# Altium PCB TAS5711.PcbDoc
Units mm, origin at the board's own origin, x right, y up, seen from the top; angles counter-clockwise.
Board outline 40 x 40 mm, 2 copper layers (Component Side, Solder Side), stack 1.57 mm thick; 58 components, 41 nets, 214 pads, 63 vias.
Unrouted connection lines stored in the file: 24.
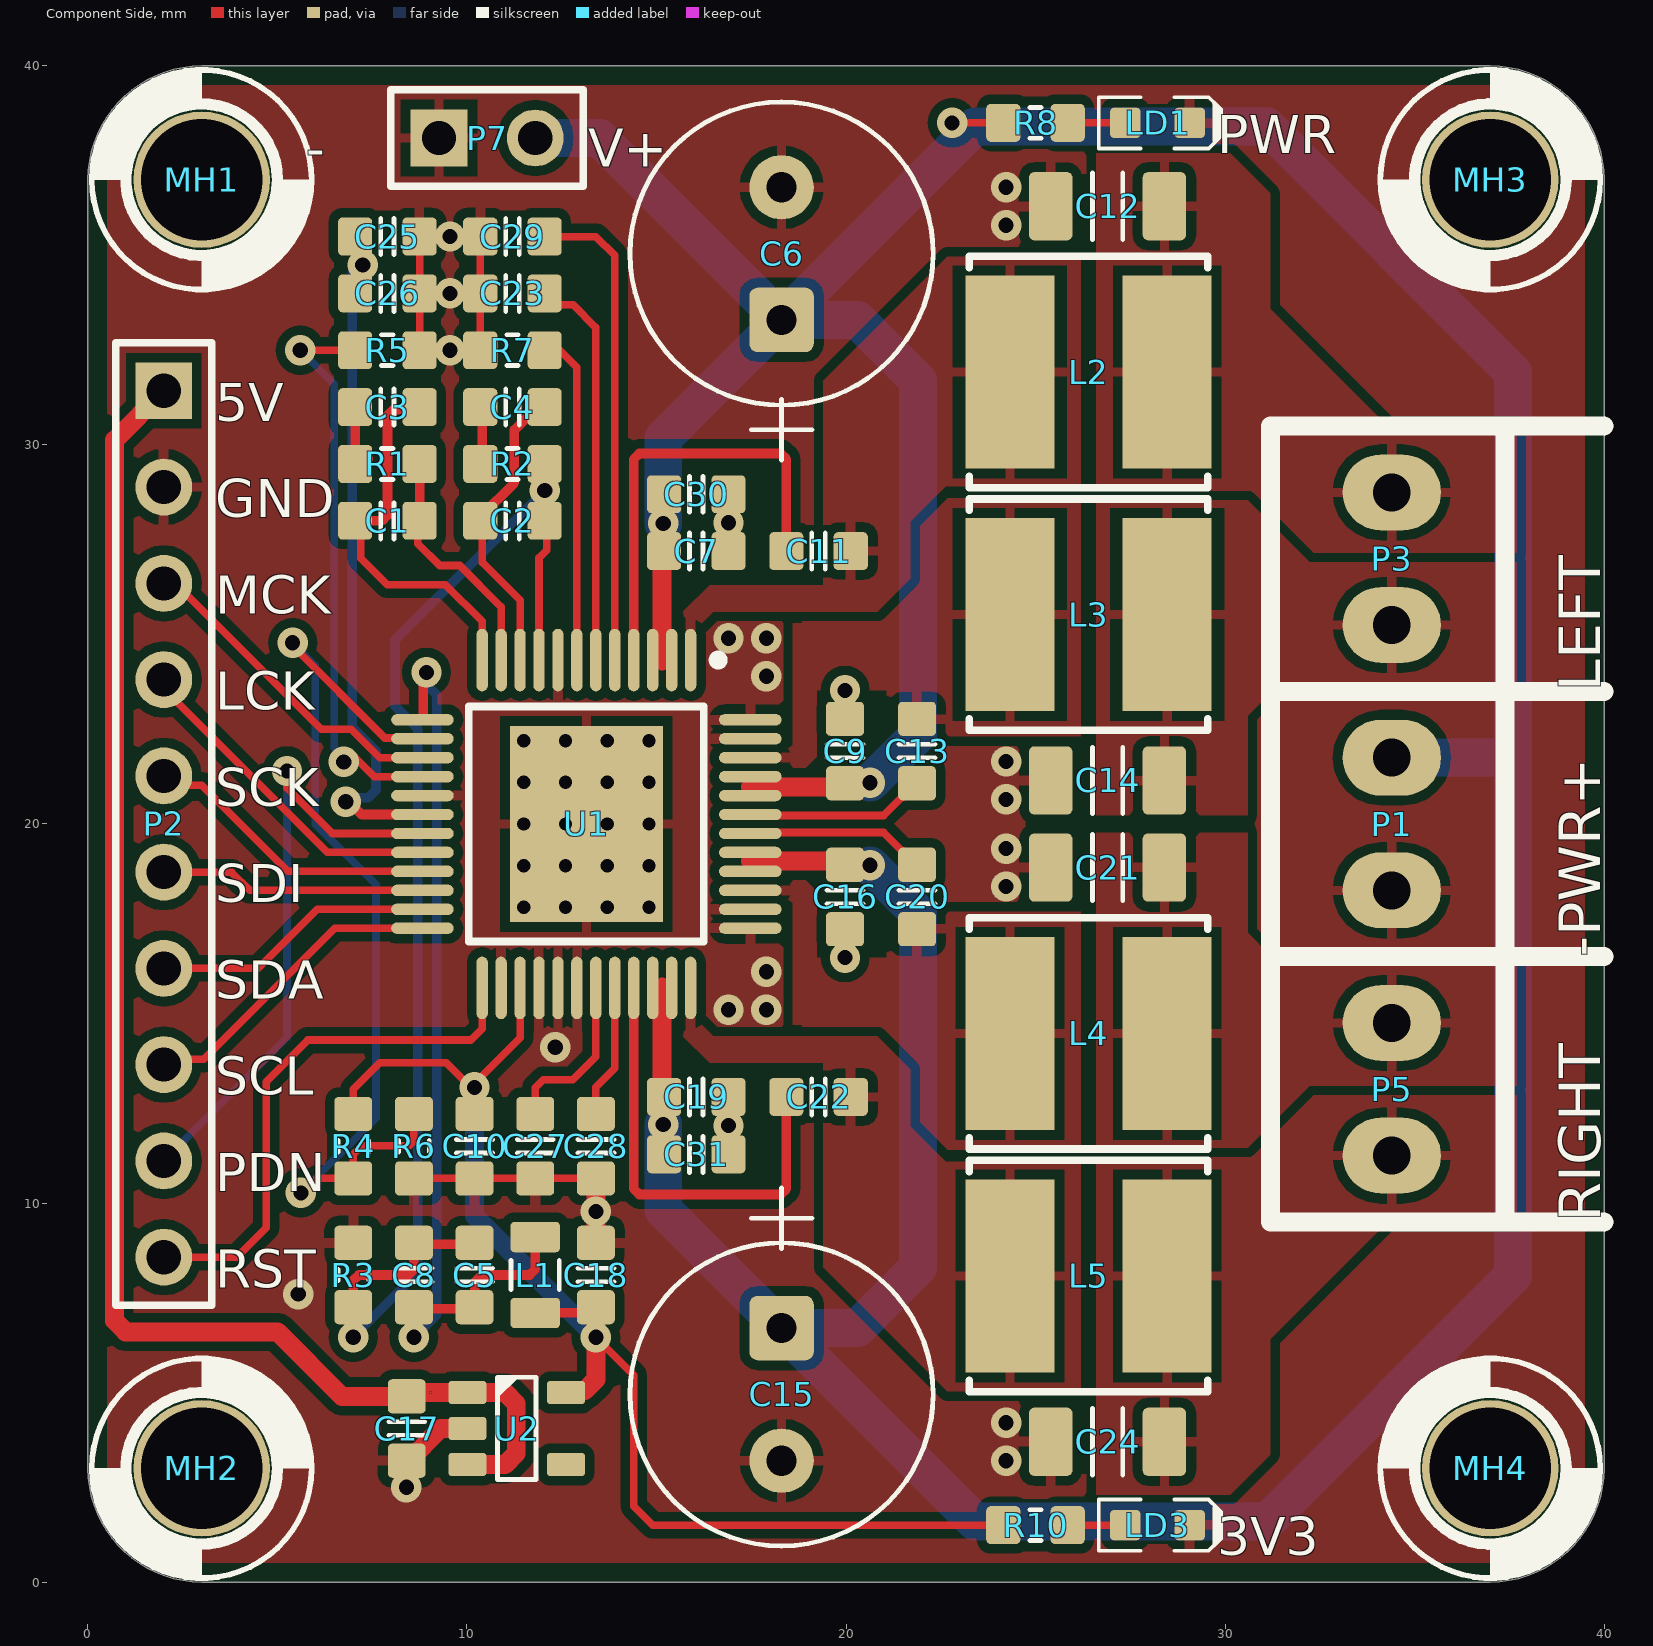
[diagram p0: Component Side view]
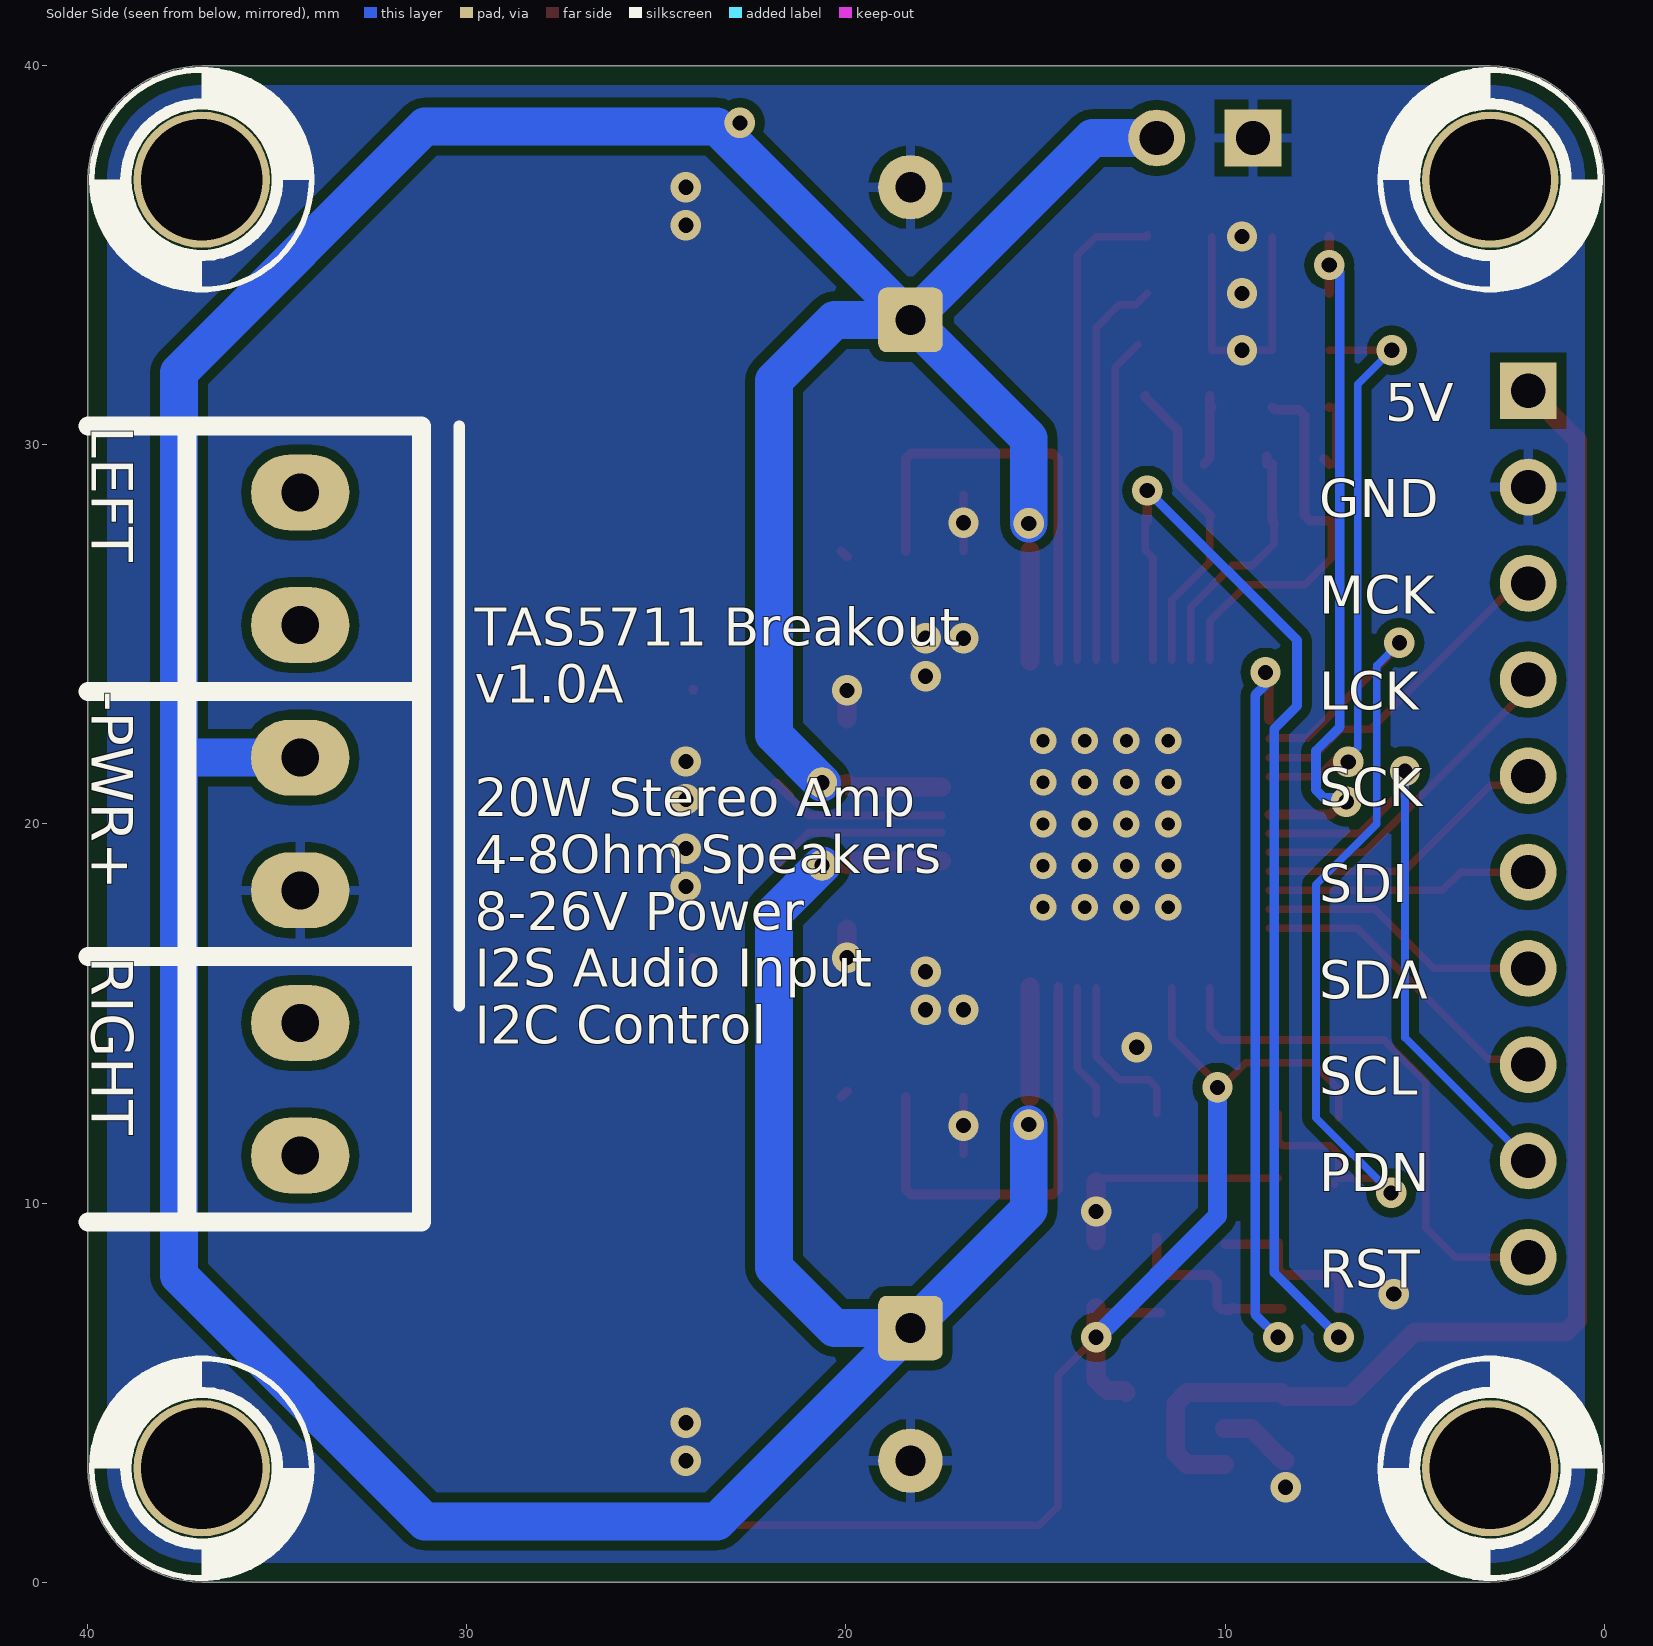
[diagram p1: Solder Side view, seen from below]
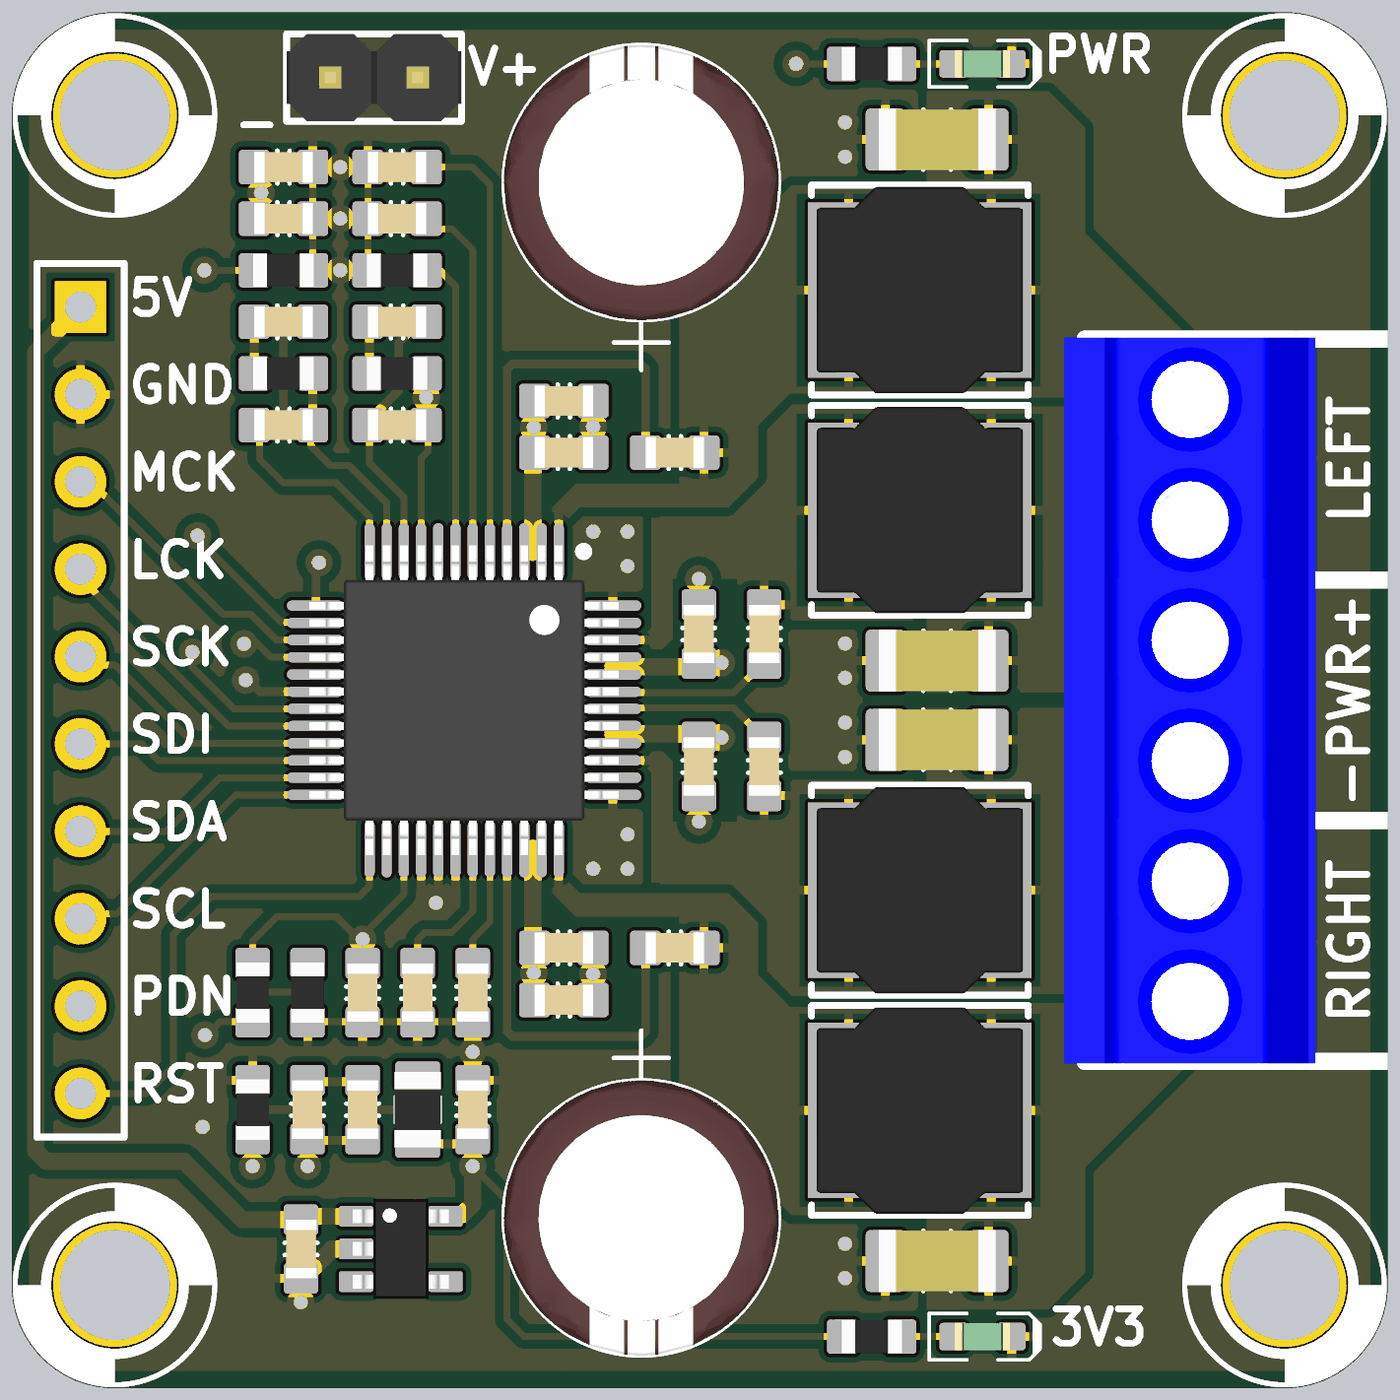
[diagram p2: 3D render of the assembled board from above, using the file's embedded part models]

## Layer stack, top to bottom
Top Solder: solder mask 0.0102, Solder Resist, Dk 3.5
Component Side: signal copper 0.035
Dielectric 3: prepreg 1.5, Dk 4.2
Solder Side: signal copper 0.035
Bottom Solder: solder mask 0.0102, Solder Resist, Dk 3.5

## Board outline
0,3 ccw(c3,3) 3,0 37,0 ccw(c37,3) 40,3 40,37 ccw(c37,37) 37,40 3,40 ccw(c3,37) 0,37

## Design rules (kind name [scope] priority, off if disabled: settings)
AssemblyTestPointUsage [All] p1 off:
AssemblyTestpoint [All] p1 off: testpointundercomponent=TRUE minsize=1.016 maxsize=2.54 preferedsize=1.524 minholesize=0 maxholesize=1.016 preferedholesize=0.813 testpointgrid=0.025 usegrid=TRUE gridtolerance=0 allowsidetop=TRUE allowsidebottom=TRUE
BoardOutlineClearance [All] p1: gap=0.254 ignorepadtopadclearanceinfootprint=FALSE except(0.5: Poly-OutlineEdge)
Clearance [All] p1: gap=0.25 ignorepadtopadclearanceinfootprint=FALSE except(0.2: Arc-SMDPad Track-SMDPad SMDPad-SMDPad)
ComponentClearance [All] p1: gap=0.2 collisioncheckmode=3 verticalgap=0.25 showdistances=FALSE
DiffPairsRouting [All] p1: maxlimit=1 minlimit=0.254 mostfreqgap=0.254 toplayer_minwidth=0.2 toplayer_maxwidth=0.4 toplayer_prefwidth=0.254 bottomlayer_minwidth=0.2 bottomlayer_maxwidth=0.4 bottomlayer_prefwidth=0.254 maxuncoupledlength=12.7
FabricationTestPointUsage [All] p1 off: valid=0 allowmultiple=FALSE
FabricationTestpoint [All] p1 off: side=3 testpointundercomponent=TRUE minsize=1.016 maxsize=2.54 preferedsize=1.524 minholesize=0 maxholesize=1.016 preferedholesize=0.813 testpointgrid=0.025 allowsidetop=TRUE allowsidebottom=TRUE usegrid=TRUE gridtolerance=0
HoleSize [All] p1: absolutevalues=TRUE maxlimit=4 minlimit=0.025 maxpercent=80.000 minpercent=20.000
MinimumSolderMaskSliver [All] p1: minsoldermaskwidth=0
NetAntennae [All] p1 off: netantennaetolerance=0
PolygonConnect PolygonConnect_Via [All vs IsVia] p1: connectstyle=Direct reliefconductorwidth=0.254 reliefentries=4 polygonreliefangle="90 Angle" airgapwidth=0.254
PolygonConnect [All] p2: connectstyle=Relief reliefconductorwidth=0.254 reliefentries=4 polygonreliefangle="90 Angle" airgapwidth=0.254
RoutingVias [All] p1: holewidth=0.4 width=0.8 viastyle="Through Hole" minholewidth=0.35 minwidth=0.7 maxholewidth=1 maxwidth=1.5
SilkToSilkClearance [All] p1: silktosilkclearance=0.1
SilkToSolderMaskClearance SilkscreenOverComponentPads [IsPad] p1: minsilkscreentomaskgap=0 clearancetoexposedcopper=TRUE
SolderMaskExpansion [All] p1: expansion=0.102 istentingtop=FALSE
Width Width_1 [All] p1: maxlimit=3 minlimit=0.2 preferedwidth=0.2 minimp=50.000000 maximp=50.000000 favimp=50.000000
19 further rules are at their usual default settings.

## Components (designator, comment, footprint, x,y, rotation, side; value= is the part's Value field where it differs from the comment)
C1 "Capacitor" CAPC1608X90N 7.9,28 r0 top value=4700pF
C2 "Capacitor" CAPC1608X90N 11.2,28 r0 top value=4700pF
C3 "Capacitor" CAPC1608X90N 7.9,31 r180 top value=0.047µF
C4 "Capacitor" CAPC1608X90N 11.2,31 r180 top value=0.047µF
C5 "Capacitor" CAPC1608X90N 10.2,8.1 r270 top value=4.7µF
C6 "CapE-8.0-THT-220uF-35V" CAPAE250P680X1220_VERT 18.3,35.05 r90 top value="220uF 35V"
C7 "Capacitor" CAPC1608X90N 16.05,27.2 r180 top value=0.1µF
C8 "Capacitor" CAPC1608X90N 8.6,8.1 r270 top value=0.1µF
C9 "Capacitor" CAPC1608X90N 19.975,21.925 r270 top value=0.1µF
C10 "Capacitor" CAPC1608X90N 10.2,11.5 r90 top value=0.1µF
C11 "Capacitor" CAPC1608X90N 19.275,27.2 r0 top value=0.033µF
C12 "Capacitor" CAPC3216X100N 26.9,36.3 r0 top value=0.68µF
C13 "Capacitor" CAPC1608X90N 21.875,21.925 r90 top value=0.033µF
C14 "Capacitor" CAPC3216X100N 26.9,21.15 r180 top value=0.68µF
C15 "CapE-8.0-THT-220uF-35V" CAPAE250P680X1220_VERT 18.3,4.95 r270 top value="220uF 35V"
C16 "Capacitor" CAPC1608X90N 19.975,18.075 r90 top value=0.1µF
C17 "Capacitor" CAPC1608X90N 8.41,4.05 r90 top value=4.7µF
C18 "Capacitor" CAPC1608X90N 13.4,8.1 r270 top value=4.7µF
C19 "Capacitor" CAPC1608X90N 16.05,12.8 r180 top value=0.1µF
C20 "Capacitor" CAPC1608X90N 21.875,18.075 r270 top value=0.033µF
C21 "Capacitor" CAPC3216X100N 26.9,18.85 r0 top value=0.68µF
C22 "Capacitor" CAPC1608X90N 19.275,12.8 r0 top value=0.033µF
C23 "Capacitor" CAPC1608X90N 11.2,34 r0 top value=2200pF
C24 "Capacitor" CAPC3216X100N 26.9,3.7 r180 top value=0.68µF
C25 "Capacitor" CAPC1608X90N 7.9,35.5 r180 top value=4.7µF
C26 "Capacitor" CAPC1608X90N 7.9,34 r180 top value=0.1µF
C27 "Capacitor" CAPC1608X90N 11.8,11.5 r90 top value=0.1µF
C28 "Capacitor" CAPC1608X90N 13.4,11.5 r90 top value=1µF
C29 "Capacitor" CAPC1608X90N 11.2,35.5 r0 top value=1µF
C30 "Capacitor" CAPC1608X90N 16.05,28.7 r180 top value=1µF
C31 "Capacitor" CAPC1608X90N 16.05,11.284 r180 top value=1µF
L1 "" "Res 2012-0805" 11.8,8.1 r90 top value=4.7µH
L2 "Inductor SMD 10uH 2.4A" "SRN6045TA SMD INDUCTOR" 26.4,31.925 r90 top value="10uH 2.4A"
L3 "Inductor SMD 10uH 2.4A" "SRN6045TA SMD INDUCTOR" 26.4,25.525 r90 top value="10uH 2.4A"
L4 "Inductor SMD 10uH 2.4A" "SRN6045TA SMD INDUCTOR" 26.4,14.475 r90 top value="10uH 2.4A"
L5 "Inductor SMD 10uH 2.4A" "SRN6045TA SMD INDUCTOR" 26.4,8.075 r90 top value="10uH 2.4A"
LD1 "LEDG  0603" "LED 1608-0603" 28.219,38.5 r0 top
LD3 "LEDG  0603" "LED 1608-0603" 28.219,1.5 r0 top
MH1 "Screw Hole" M3-Hole-2 3,37 r90 top
MH2 "Screw Hole" M3-Hole-2 3,3 r0 top
MH3 "Screw Hole" M3-Hole-2 37,37 r0 top
MH4 "Screw Hole" M3-Hole-2 37,3 r90 top
P1 "PWR_TERM" "TERM2 3.5mm" 34.4,21.75 r270 top
P2 "Header 10" HDR1X10 2,31.43 r270 top
P3 "SPKR_LEFT_TERM" "TERM2 3.5mm" 34.4,28.75 r270 top
P5 "SPKR_RIGHT_TERM" "TERM2 3.5mm" 34.4,14.75 r270 top
P7 "PWR_HDR" HDR1X2-HEADER 9.26,38.1 r0 top
R1 "Resistor" "RES 1608-0603" 7.9,29.5 r0 top value=470R
R2 "Resistor" "RES 1608-0603" 11.2,29.5 r0 top value=470R
R3 "Res-0603-0R" "RES 1608-0603" 7,8.1 r270 top value=0R
R4 "Resistor" "RES 1608-0603" 7,11.5 r270 top value="10K (DNP)"
R5 "Resistor" "RES 1608-0603" 7.9,32.5 r180 top value=18.2K
R6 "Resistor" "RES 1608-0603" 8.6,11.5 r270 top value=10K
R7 "Resistor" "RES 1608-0603" 11.2,32.5 r0 top value=22K
R8 "Resistor" "RES 1608-0603" 25,38.5 r180 top value=10K
R10 "Resistor" "RES 1608-0603" 25,1.5 r180 top value=1K
U1 "TAS5711" TSQFP50P900X900X105_HS-49M 13.15,20 r270 top
U2 "AP2112K-3.3TRG1" SOT23-5 11.31,4.05 r0 top

## Footprints (in the part's own frame and the unit in brackets; to place one, negate y for a bottom-side part, rotate by r counter-clockwise, add the part's x,y. Pads: shape width x height; smd on the part's side, far side on the other; paste and mask are expansions set on the pad)
CAPAE250P680X1220_VERT [mm]
  round 0.508 on Mech15: 0(0,0)
  rrect25% 1.7x1.7 hole 0.8: 1(-1.75,0)
  round 1.7 hole 0.8: 2(1.75,0)
  silkscreen extent -5.45,-4 4,4, body extent -4,-4 4,4, height 11.5
CAPC1608X90N [mm] "Chip Capacitor, Body 1.6x0.8mm, EIA 0603, IPC Medium Density"
  round 0.254 on Mech15: 0(0,0)
  rrect25% 0.9x1 smd: 1(-0.85,0) 2(0.85,0)
  Component Side pour cut-out: -0.6,0.5 -0.4,0.7 0.4,0.7 0.6,0.5 0.6,-0.5 0.4,-0.7 -0.4,-0.7 -0.6,-0.5
  silkscreen extent -0.18,-0.48 0.18,0.48, body extent -0.85,-0.45 0.85,0.45, height 0.89
CAPC3216X100N [mm] "Chip Capacitor, Body 3.2x1.6mm, 1.0mm H, EIA 1206, IPC Medium Density"
  round 0.508 on Mech15: 0(0,0)
  rrect25% 1.15x1.8 smd: 1(-1.5,0) 2(1.5,0)
  silkscreen extent -0.4,-0.88 0.4,0.88, body extent -1.7,-0.9 1.7,0.9, height 1
HDR1X2-HEADER [mm]
  rect 1.5x1.5 hole 0.9: 1(0,0)
  round 1.5 hole 0.9: 2(2.54,0)
  silkscreen extent -1.27,-1.27 3.81,1.27, body extent -1.27,-1.27 3.81,1.27, height 8.6
HDR1X10 [mm] "Connector; Header; 10 Position"
  rect 1.5x1.5 hole 0.9: 1(0,0)
  round 1.5 hole 0.9: 2(2.54,0) 3(5.08,0) 4(7.62,0) 5(10.16,0) 6(12.7,0) 7(15.24,0) 8(17.78,0) 9(20.32,0) 10(22.86,0)
  silkscreen extent -1.27,-1.27 24.13,1.27
"LED 1608-0603" [mm]
  round 0.254 on Mech15: 0(0,0)
  rrect25% 0.8x0.8 smd: 1(-0.85,0) 2(0.85,0)
  Component Side pour cut-out: -0.5,0.5 0.5,0.5 0.5,-0.5 -0.5,-0.5
  silkscreen extent -1.55,-0.67 1.68,0.67, body extent -0.8,-0.4 0.8,0.4, height 0.75
M3-Hole-2 [mm]
  round 3.6 hole 3.2: M3(0,0)
  silkscreen extent -2.9,-2.93 2.9,2.93
"RES 1608-0603" [mm]
  round 0.254 on Mech15: 0(0,0)
  rrect25% 0.9x1 smd: 1(-0.85,0) 2(0.85,0)
  Component Side pour cut-out: -0.6,0.5 -0.4,0.7 0.4,0.7 0.6,0.5 0.6,-0.5 0.4,-0.7 -0.4,-0.7 -0.6,-0.5
  silkscreen extent -0.15,-0.41 0.15,0.41, body extent -0.87,-0.47 0.88,0.48, height 0.54
"Res 2012-0805" [mm]
  round 0.254 on Mech15: 0(0,0)
  rrect25% 0.8x1.3 smd: 1(-1,0) 2(1,0)
  Component Side pour cut-out: -0.725,0.65 -0.525,0.85 0.525,0.85 0.725,0.65 0.725,-0.65 0.525,-0.85 -0.525,-0.85 -0.725,-0.65
  silkscreen extent -0.38,-0.64 0.38,0.64, body extent -1.1,-0.67 1.1,0.68, height 0.69
SOT23-5 [mm]
  round 0.5 on Mech15: 0(0,0)
  rrect25% 1x0.6 smd: 1(-1.3,0.95) 2(-1.3,0) 3(-1.3,-0.95) 4(1.3,-0.95) 5(1.3,0.95)
  silkscreen extent -0.51,-1.35 0.51,1.35, body extent -1.4,-1.45 1.4,1.45, height 1.44
"SRN6045TA SMD INDUCTOR" [mm]
  rect 5.1x2.35 smd: 1(0,2.075) 2(0,-2.075)
  silkscreen extent -3.05,-3.15 3.05,3.15, body extent -3,-3 3,3, height 4.2
"TERM2 3.5mm" [mm]
  oval 2x2.6 hole 1: 1(0,0) 2(3.5,0)
  body extent -1.8,-3.79 5.31,3.5, height 8.51
TSQFP50P900X900X105_HS-49M [mm] "TSQFP, 48-Leads, Body 7.00x7.00mm, Pitch 0.50mm, Thermal Pad 5.17x4.03mm, IPC Low Density"
  oval 1.65x0.3 smd: 1(-4.325,2.75) 2(-4.325,2.25) 3(-4.325,1.75) 4(-4.325,1.25) 5(-4.325,0.75) 6(-4.325,0.25) 7(-4.325,-0.25) 8(-4.325,-0.75) 9(-4.325,-1.25) 10(-4.325,-1.75) 11(-4.325,-2.25) 12(-4.325,-2.75) 25(4.325,-2.75) 26(4.325,-2.25) 27(4.325,-1.75) 28(4.325,-1.25) 29(4.325,-0.75) 30(4.325,-0.25) 31(4.325,0.25) 32(4.325,0.75) 33(4.325,1.25) 34(4.325,1.75) 35(4.325,2.25) 36(4.325,2.75)
  oval 0.3x1.65 smd: 13(-2.75,-4.325) 14(-2.25,-4.325) 15(-1.75,-4.325) 16(-1.25,-4.325) 17(-0.75,-4.325) 18(-0.25,-4.325) 19(0.25,-4.325) 20(0.75,-4.325) 21(1.25,-4.325) 22(1.75,-4.325) 23(2.25,-4.325) 24(2.75,-4.325) 37(2.75,4.325) 38(2.25,4.325) 39(1.75,4.325) 40(1.25,4.325) 41(0.75,4.325) 42(0.25,4.325) 43(-0.25,4.325) 44(-0.75,4.325) 45(-1.25,4.325) 46(-1.75,4.325) 47(-2.25,4.325) 48(-2.75,4.325)
  rect 5.17x4.03 smd: 49(0,0)
  silkscreen extent -4.45,-3.1 3.1,3.6, body extent -4.5,-4.5 4.5,4.5, height 1.05

## Part data
C1 C2: library part UMJ107BB7472KAHT, "CAP CER 4700PF 50V X7R 0603", Manufacturer 1="Taiyo Yuden", Operating Temperature="-55°C ~ 125°C", Package=0402, Package / Case="0603 (1608 Metric)", Supplier Part Number 1=587-4470-1-ND, Temperature Coefficient=X7R, TOLERANCE=±10%, Voltage=50V, Manufacturer Part Number 1=UMJ107BB7472KAHT, Note="Approved sub OK", Revision="July-2002: Re-released for DXP Platform.", Size / Dimension="0.063\" L x 0.031\" W (1.60mm x 0.80mm)", Supplier 1=Digi-Key, Thickness (Max)="0.039\" (1.00mm)", Type=X5R
C3 C4: library part TMK107BJ473KAHT, "CAP CER 0.047UF 25V X5R 0603", Manufacturer 1="Taiyo Yuden", Operating Temperature="-55°C ~ 85°C", Package=0402, Package / Case="0603 (1608 Metric)", Supplier Part Number 1=587-3475-1-ND, Temperature Coefficient=X5R, TOLERANCE=±10%, Voltage=25V, Manufacturer Part Number 1=TMK107BJ473KAHT, Note="Approved sub OK", Revision="July-2002: Re-released for DXP Platform.", Size / Dimension="0.063\" L x 0.031\" W (1.60mm x 0.80mm)", Supplier 1=Digi-Key, Thickness (Max)="0.035\" (0.90mm)", Type=X5R
C5 C17 C18 C25: library part C1608X5R1C475K080AC, "CAP CER 4.7UF 16V X5R 0603", Manufacturer 1="TDK Corporation", Operating Temperature="-55°C ~ 85°C", Package=0402, Package / Case="0603 (1608 Metric)", Supplier Part Number 1=445-7478-1-ND, Temperature Coefficient=X5R, TOLERANCE=±10%, Voltage=16V, Manufacturer Part Number 1=C1608X5R1C475K080AC, Note="Approved sub OK", Revision="July-2002: Re-released for DXP Platform.", Size / Dimension="0.063\" L x 0.031\" W (1.60mm x 0.80mm)", Supplier 1=Digi-Key, Thickness (Max)="0.035\" (0.90mm)", Type=X5R
C6 C15: "CAP ALUM 220UF 20% 35V RADIAL", Supplier Part Number 1=732-8946-1-ND, Note="Approved sub OK", Published=8-Jun-2000, Publisher="Altium Limited", Revision="July-2002: Re-released for DXP Platform.", Supplier 1=Digi-Key
C7 C8 C9 C10 C16 C19 C26 C27: library part UMJ107BB7104KAHT, "CAP CER 0.1UF 50V X7R 0603", Manufacturer 1="Taiyo Yuden", Operating Temperature="-55°C ~ 125°C", Package=0402, Package / Case="0603 (1608 Metric)", Supplier Part Number 1=587-4474-1-ND, Temperature Coefficient=X7R, TOLERANCE=±10%, Voltage=50V, Manufacturer Part Number 1=UMJ107BB7104KAHT, Note="Approved sub OK", Revision="July-2002: Re-released for DXP Platform.", Size / Dimension="0.063\" L x 0.031\" W (1.60mm x 0.80mm)", Supplier 1=Digi-Key, Thickness (Max)="0.039\" (1.00mm)", Type=X5R
C11 C13 C20 C22: library part UMJ107BB7104KAHT, "CAP CER 0.033UF 50V X7R 0603", Manufacturer 1="Taiyo Yuden", Operating Temperature="-55°C ~ 125°C", Package=0402, Package / Case="0603 (1608 Metric)", Supplier Part Number 1=399-14292-1-ND, Temperature Coefficient=X7R, TOLERANCE=±10%, Voltage=50V, Manufacturer Part Number 1=UMJ107BB7104KAHT, Note="Approved sub OK", Revision="July-2002: Re-released for DXP Platform.", Size / Dimension="0.063\" L x 0.031\" W (1.60mm x 0.80mm)", Supplier 1=Digi-Key, Thickness (Max)="0.039\" (1.00mm)", Type=X7R
C12 C14 C21 C24: library part C3216X7R2A684K160AA, "CAP CER 0.68UF 100V X7R 1206", Manufacturer 1="TDK Corporation", Operating Temperature="-55°C ~ 125°C", Package=0402, Package / Case="1206 (3216 Metric)", Supplier Part Number 1=445-14810-1-ND, Temperature Coefficient=X7R, TOLERANCE=±10%, Voltage=100V, Manufacturer Part Number 1=C3216X7R2A684K160AA, Note="Approved sub OK", Revision="July-2002: Re-released for DXP Platform.", Size / Dimension="0.126\" L x 0.063\" W (3.20mm x 1.60mm)", Supplier 1=Digi-Key, Thickness (Max)="0.071\" (1.80mm)", Type=X5R
C23: library part C1608X5R2A222M080AA, "CAP CER 2200PF 100V X5R 0603", Manufacturer 1="TDK Corporation", Operating Temperature="-55°C ~ 85°C", Package=0402, Package / Case="0603 (1608 Metric)", Supplier Part Number 1=445-14182-1-ND, Temperature Coefficient=X5R, TOLERANCE=±20%, Voltage=100V, Manufacturer Part Number 1=C1608X5R2A222M080AA, Note="Approved sub OK", Revision="July-2002: Re-released for DXP Platform.", Size / Dimension="0.063\" L x 0.031\" W (1.60mm x 0.80mm)", Supplier 1=Digi-Key, Thickness (Max)="0.035\" (0.90mm)", Type=X5R
C28 C29 C30 C31: library part GMK107BJ105KAHT, "CAP CER 1UF 35V X5R 0603", Manufacturer 1="Taiyo Yuden", Operating Temperature="-55°C ~ 85°C", Package=0402, Package / Case="0603 (1608 Metric)", Supplier Part Number 1=587-3358-1-ND, Temperature Coefficient=X5R, TOLERANCE=±10%, Voltage=35V, Manufacturer Part Number 1=GMK107BJ105KAHT, Note="Approved sub OK", Revision="July-2002: Re-released for DXP Platform.", Size / Dimension="0.063\" L x 0.031\" W (1.60mm x 0.80mm)", Supplier 1=Digi-Key, Thickness (Max)="0.035\" (0.90mm)", Type=X5R
L1: library part "Ferrite Bead SMD 0805", "FIXED IND 4.7UH 500MA 300MOHM SM", Supplier Part Number 1=445-6401-1-ND, Note="Approved sub OK", Published=24-Mar-1999, Publisher="Altium Limited", Revision="July-2002: Re-released for DXP Platform.", Supplier 1=Digi-Key
L2 L3 L4 L5: library part "Inductor SMD 33uH 2.5A", "FIXED IND 10UH 2.4A 59.8MOHM SMD", Supplier Part Number 1=587-2946-1-ND, Published=24-Mar-1999, Publisher="Altium Limited", Revision="July-2002: Re-released for DXP Platform.", Supplier 1=Digi-Key
LD1 LD3: "LED GREEN CLEAR CHIP SMD 0603", Supplier Part Number 1=160-1435-2-ND, Note="Approved sub OK", Supplier 1=Digi-Key
P1 P3 P5: library part ScrewTerminal-3.5mm-2Way, "Screw Terminal 3.5mm 2-Way", Supplier Part Number 1=277-5719-ND, Note="Approved sub OK", Supplier 1=Digi-Key
P2: "Header, 10-Pin", Manufacturer 1="Generic Header", LatestRevisionDate=17-Jul-2002, LatestRevisionNote="Re-released for DXP Platform.", Note="Approved sub OK", Publisher="Altium Limited"
P7: library part "Header 1X2", "Header, 2-Pin", Manufacturer 1="Generic Header", Note="Approved sub OK"
R1 R2: library part RC0603FR-07470RL, "RES SMD 470 OHM 1% 1/10W 0603", Manufacturer 1=Yageo, Operating Temperature="-55°C ~ 155°C", Package / Case="0603 (1608 Metric)", Power (Watts)="0.1W, 1/10W", Supplier Part Number 1=311-470HRCT-ND, Temperature Coefficient=±100ppm/°C, TOLERANCE=±1%, Composition="Thick Film", Features="Moisture Resistant", Height - Seated (Max)="0.022\" (0.55mm)", Manufacturer Part Number 1=RC0603FR-07470RL, Note="Approved sub OK", Published=8-Jun-2000, Publisher="Altium Limited", Revision="July-2002: Re-released for DXP Platform.", Size / Dimension="0.063\" L x 0.031\" W (1.60mm x 0.80mm)", Supplier 1=Digi-Key
R3: "RES 0 OHM JUMPER 1/10W 0603", Supplier Part Number 1=311-0.0GRCT-ND, Note="Approved sub OK", Published=8-Jun-2000, Publisher="Altium Limited", Revision="July-2002: Re-released for DXP Platform.", Supplier 1=Digi-Key
R4 R6 R8: library part RC0603FR-0710KL, "RES SMD 10K OHM 1% 1/10W 0603", Manufacturer 1=Yageo, Operating Temperature="-55°C ~ 155°C", Package / Case="0603 (1608 Metric)", Power (Watts)="0.1W, 1/10W", Supplier Part Number 1=311-10.0KHRCT-ND, Temperature Coefficient=±100ppm/°C, TOLERANCE=±1%, Composition="Thick Film", Features="Moisture Resistant", Height - Seated (Max)="0.022\" (0.55mm)", Manufacturer Part Number 1=RC0603FR-0710KL, Note="Approved sub OK", Published=8-Jun-2000, Publisher="Altium Limited", Revision="July-2002: Re-released for DXP Platform.", Size / Dimension="0.063\" L x 0.031\" W (1.60mm x 0.80mm)", Supplier 1=Digi-Key
R5: library part RC0603FR-0718K2L, "RES SMD 18.2K OHM 1% 1/10W 0603", Manufacturer 1=Yageo, Operating Temperature="-55°C ~ 155°C", Package / Case="0603 (1608 Metric)", Power (Watts)="0.1W, 1/10W", Supplier Part Number 1=311-18.2KHRCT-ND, Temperature Coefficient=±100ppm/°C, TOLERANCE=±1%, Composition="Thick Film", Features="Moisture Resistant", Height - Seated (Max)="0.022\" (0.55mm)", Manufacturer Part Number 1=RC0603FR-0718K2L, Note="Approved sub OK", Published=8-Jun-2000, Publisher="Altium Limited", Revision="July-2002: Re-released for DXP Platform.", Size / Dimension="0.063\" L x 0.031\" W (1.60mm x 0.80mm)", Supplier 1=Digi-Key
R7: library part RC0603FR-0722KL, "RES SMD 22K OHM 1% 1/10W 0603", Manufacturer 1=Yageo, Operating Temperature="-55°C ~ 155°C", Package / Case="0603 (1608 Metric)", Power (Watts)="0.1W, 1/10W", Supplier Part Number 1=311-22.0KHRCT-ND, Temperature Coefficient=±100ppm/°C, TOLERANCE=±1%, Composition="Thick Film", Features="Moisture Resistant", Height - Seated (Max)="0.022\" (0.55mm)", Manufacturer Part Number 1=RC0603FR-0722KL, Note="Approved sub OK", Published=8-Jun-2000, Publisher="Altium Limited", Revision="July-2002: Re-released for DXP Platform.", Size / Dimension="0.063\" L x 0.031\" W (1.60mm x 0.80mm)", Supplier 1=Digi-Key
R10: library part RC0603FR-071KL, "RES SMD 1K OHM 1% 1/10W 0603", Manufacturer 1=Yageo, Operating Temperature="-55°C ~ 155°C", Package / Case="0603 (1608 Metric)", Power (Watts)="0.1W, 1/10W", Supplier Part Number 1=311-1.00KHRCT-ND, Temperature Coefficient=±100ppm/°C, TOLERANCE=±1%, Composition="Thick Film", Features="Moisture Resistant", Height - Seated (Max)="0.022\" (0.55mm)", Manufacturer Part Number 1=RC0603FR-071KL, Note="Approved sub OK", Published=8-Jun-2000, Publisher="Altium Limited", Revision="July-2002: Re-released for DXP Platform.", Size / Dimension="0.063\" L x 0.031\" W (1.60mm x 0.80mm)", Supplier 1=Digi-Key
U1: library part "IC - DAC, I2S Amplifier - TAS5711", "IC AMP D DUAL/QUAD 21W 48HTQFP", Supplier Part Number 1=296-25564-1-ND, Supplier 1=Digi-Key
U2: library part "Regulator - AP2112K 3.3V Linear Regulator", "IC REG LINEAR 3.3V 600MA SOT25", Manufacturer 1="Diodes Incorporated", Supplier Part Number 1=AP2112K-3.3TRG1DICT-ND, Manufacturer Part Number 1=AP2112K-3.3TRG1, Supplier 1=Digi-Key

## Via types
v1: diameter 0.8, hole 0.4, Component Side to Solder Side, tented both sides, 43 vias
v2: diameter 0.7, hole 0.35, Component Side to Solder Side, tented bottom, 20 vias

## Nets (pads, with @x,y where several pads share a name; then routed paths per layer and width w, separated by ;. In a path a pad name is that pad's centre, name@x,y a point inside that pad or via, vN(x,y) a via of type N, cw(c..) or ccw(c..) an arc to the next point about the centre after c; other vN are vias at no path point)
+3V3: C10.2 C18.2 L1.1 R4.1 R10.2 U1.27 U2.5 | length 35.5
  Component Side w0.2: R4.1@7,12.25 7,13 7.7,13.7 9.45,13.7 10.093,13.057 v1@10.2,13.057 ; C10.2@10.2,12.25 10.2,12.95 v1@10.2,13.057 ; U1.27 11.4,14.364 10.2,13.164 v1@10.2,13.057 ; v1(13.4,6.458) 14.4,5.458 14.4,2 14.9,1.5 R10.2
  Component Side w0.254: L1.1@11.7,7.1 C18.2@13.25,7.1
  Component Side w0.5: U2.5 12.66,5.05 13.107,5.05 13.4,5.343 v1(13.4,6.458) C18.2
  Solder Side w0.5: v1@10.2,12.95 10.2,9.658 v1(13.4,6.458)
  other v1: 10.2,13.05
+5V: C17.2 P2.1 U2.1 U2.3 | length 39.4
  Component Side w0.5: P2.1 0.7,30.13 0.7,6.893 0.993,6.6 5,6.6 6.7,4.9 C17.2 8.51,5 U2.1 11.007,5 11.3,4.707 11.3,3.393 11.007,3.1 U2.3
+VDDA: C5.2 C8.2 L1.2 U1.13 | length 24.3
  Component Side w0.254: C8.2@8.498,7.208 C5.2@9.842,7.208 ; U1.13 8.846,22.771 8.846,23.915 v1(8.931,24) ; C5.2@9.8,7.25 C5.2@9.842,7.208 ; C5.2@9.998,7.175 9.875,7.175 C5.2@9.842,7.208 ; C5.2@9.998,7.208 C5.2@9.842,7.208 ; C5.2@10.1,7.2 10.2,7.3 10.2,7.9 10.4,8.1 11.651,8.1 11.8,8.249 L1.2
  Solder Side w0.254: v1(8.598,6.458) 9.204,7.063 9.204,23.4 8.931,23.672 v1(8.931,24)
A_SEL: R4.2 R6.1 U1.14 | length 25.5
  Component Side w0.2: v1(5.4,24.782) 5.4,24.7 7.831,22.269 8.806,22.269 U1.14 ; v1(5.616,10.267) 5.67,10.267 6.053,10.65 R4.2 7,11.284 7.227,11.511 8.481,11.511 8.598,11.629 8.598,12.348 R6.1 ; R4.2@7.1,10.5 R4.2@7.15,10.55
  Solder Side w0.2: v1(5.4,24.782) 6,24.182 6,20 7.6,18.4 7.6,12.25 v1(5.616,10.267)
AGND: C2.2 C5.1 C8.1 R2.2 R3.2 U1.9 | length 34.1
  Component Side w0.2: U1.9 11.9,27.027 12.1,27.227 C2.2@12.1,28.1
  Component Side w0.254: R3.2@6.998,7.208 6.998,7.951 7.147,8.1 8.451,8.1 8.6,8.249 C8.1 ; C8.1@8.6,8.908 C5.1@9.998,8.908 ; C2.2 v1(12.05,28.8)
  Solder Side w0.254: v1(6.998,6.458) 8.7,8.159 8.7,22.516 8.1,23.116 8.1,24.85 11.872,28.622 v1@11.872,28.828
AMP_PDN: P2.9 U1.19 | length 16.2
  Component Side w0.2: v1(5.25,21.4) 5.25,20.95 6.45,19.75 U1.19
  Solder Side w0.2: P2.9 5.25,14.36 v1(5.25,21.4)
AMP_RST: P2.10 U1.25 | length 14.2
  Component Side w0.2: P2.10 3.926,8.57 4.7,9.344 4.7,13.2 5.8,14.3 10.1,14.3 10.4,14.6 U1.25
GND: C6.2 C7.1 C9.1 C10.1 C12.1 C14.2 C15.2 C16.1 C17.1 C18.1 C19.1 C21.1 C23.1 C24.2 C25.1 C26.1 C27.1 C28.1 C29.1 C30.1 C31.1 LD1.2 LD3.2 P1.2 P2.2 P7.1 R3.1 R5.1 R6.2 R7.1 U1.8 U1.17 U1.26 U1.28 U1.29 U1.30 U1.37 U1.38 U1.47 U1.48 U1.49 U2.2 | length 20.4
  Component Side w0.2: R6.2 C10.1 C27.1 C28.1 ; C25.1 C26.1 R5.1 R7.1 C23.1 C29.1 ; C31.1 C19.1 ; C7.1 C30.1
  Component Side w0.5: C17.1 8.46,3.2 9.3,4.04 9.3,4.05 U2.2 ; C18.1@13.4,9 v1(13.4,9.775) C28.1@13.4,10.55 ; v1(19.975,16.475) C16.1 ; C9.1 v1(19.975,23.525)
  other v1: 8.4,2.5 24.225,3.2 24.225,4.2 5.548,7.596 16.9,12.042 12.331,14.111 16.9,15.1 17.9,15.1 17.9,16.1 24.225,18.35 24.225,19.35 24.225,20.65 24.225,21.65 17.9,23.9 16.9,24.9 17.9,24.9 16.9,27.95 9.55,32.5 9.55,34 9.55,35.5 24.225,35.8 24.225,36.8
  other v2: 11.5,17.8 12.6,17.8 13.7,17.8 14.8,17.8 11.5,18.9 12.6,18.9 13.7,18.9 14.8,18.9 11.5,20 12.6,20 13.7,20 14.8,20 11.5,21.1 12.6,21.1 13.7,21.1 14.8,21.1 11.5,22.2 12.6,22.2 13.7,22.2 14.8,22.2
I2C_SCL: P2.8 U1.24 | length 8.4
  Component Side w0.2: P2.8@2.11,13.65 P2.8 2.14,13.79 3.05,13.79 6.51,17.25 U1.24
I2C_SDA: P2.7 U1.23 | length 7.5
  Component Side w0.2: P2.7 4.49,16.19 6.05,17.75 U1.23
I2S_LRCLK: P2.4 U1.20 | length 8.9
  Component Side w0.2: P2.4 2,23.564 6.314,19.25 U1.20
I2S_MCLK: P2.3 U1.15 | length 8.7
  Component Side w0.2: P2.3 2.3,26.35 6.15,22.5 6.95,22.5 7.7,21.75 U1.15
I2S_SCLK: P2.5 U1.21 | length 7.9
  Component Side w0.2: P2.5 2.249,21.021 3.001,21.021 5.272,18.75 U1.21
I2S_SDIN: P2.6 U1.22 | length 7
  Component Side w0.2: P2.6 3.786,18.73 4.266,18.25 U1.22
NetC1_1: C1.1 C3.1 U1.12 | length 10.4
  Component Side w0.2: C1.1@7.2,28 7.2,27.016 7.9,26.316 9.429,26.316 10.4,25.345 U1.12
  Component Side w0.254: C1.1 7.2,28 7.752,28 7.901,28.149 7.901,30.778 8.05,30.927 8.677,30.927 C3.1
NetC1_2: C1.2 R1.2 U1.11 | length 6.6
  Component Side w0.2: C1.2@8.7,27.95 8.7,27.4 9.28,26.82 9.805,26.82 10.9,25.725 U1.11
  Component Side w0.254: C1.2@8.7,27.95 C1.2 R1.2 ; R1.2@8.9,29.5 R1.2@8.9,29.7
NetC2_1: C2.1 C4.1 U1.10 | length 8.1
  Component Side w0.2: C2.1@10.4,28.1 10.4,26.9 11.4,25.9 U1.10
  Component Side w0.254: C2.1@10.375,28.125 11.25,29 11.25,30.4 12.1,31.25 C4.1@12.1,31.3
NetC3_2: C3.2 R1.1 | length 1.7
  Component Side w0.254: R1.1 C3.2 ; R1.1@7.25,29.5 R1.1@7.39,29.64
NetC4_2: C4.2 R2.1 | length 1.9
  Component Side w0.254: C4.2@10.4,31.3 10.4,29.7 10.4,29.65 R2.1@10.55,29.5
NetC11_1: C11.1 U1.4 | length 11.9
  Component Side w0.254: U1.4@14.4,24.3 14.4,29.627 14.549,29.776 18.276,29.776 18.425,29.627 C11.1
NetC11_2: C11.2 L2.1 U1.1 | length 0.2
  Component Side w0.254: C11.2@19.975,27.05 C11.2
NetC12_2: C12.2 L2.2 P3.1
NetC13_1: C13.1 U1.43 | length 4.8
  Component Side w0.2: U1.43@17.475,20.225 20.996,20.225 C13.1@21.5,20.729
  Component Side w0.25: C13.1@21.5,20.729 21.5,20.75 21.825,21.075 C13.1
NetC13_2: C13.2 L3.1 U1.46 | length 0
  Component Side w0.25: L3.1@24.025,23.525 L3.1@24.025,23.55
NetC14_1: C14.1 L3.2 P3.2
NetC20_1: C20.1 U1.42 | length 4.8
  Component Side w0.2: U1.42@17.475,19.775 20.996,19.775 C20.1@21.5,19.271
  Component Side w0.25: C20.1@21.5,19.271 21.5,19.25 21.825,18.925 C20.1
NetC20_2: C20.2 L4.1 U1.39 | length 0
  Component Side w0.25: L4.1@24.025,16.45 L4.1@24.025,16.475
NetC21_2: C21.2 L4.2 P5.1
NetC22_1: C22.1 U1.33 | length 11.9
  Component Side w0.254: U1.33@14.4,15.7 14.4,10.373 14.549,10.224 18.276,10.224 18.425,10.373 C22.1
NetC22_2: C22.2 L5.1 U1.36 | length 0.2
  Component Side w0.254: C22.2@19.975,12.95 C22.2
NetC23_2: C23.2 U1.6 | length 10.5
  Component Side w0.2: C23.2 12.35,33.7 12.8,33.7 13.4,33.1 U1.6
NetC24_1: C24.1 L5.2 P5.2
NetC25_2: C25.2 C26.2 U1.18 | length 19.1
  Component Side w0.254: v1(6.8,20.585) 6.887,20.585 7.222,20.25 U1.18 ; C26.2@7.25,34 C25.2@7.25,35.5
  Solder Side w0.254: v1@6.998,20.387 v1(6.8,20.585) 6.904,20.69 7.39,20.69 7.6,20.9 7.6,21.933 6.972,22.562 6.972,34.572 v1@7.2,34.8
  other v1: 7.25,34.75
NetC27_2: C27.2 U1.31 | length 4.4
  Component Side w0.2: C27.2 11.8,13.044 12.008,13.252 12.793,13.252 13.4,13.86 U1.31
NetC28_2: C28.2 U1.32 | length 3.5
  Component Side w0.2: C28.2 13.4,13.056 13.9,13.556 U1.32
NetC29_2: C29.2 U1.5 | length 12.8
  Component Side w0.2: C29.2@12.05,35.55 C29.2 13.4,35.5 13.9,35 U1.5
NetLD1_1: LD1.1 R8.1 | length 1.5
  Component Side w0.2: R8.1 LD1.1
NetLD3_1: LD3.1 R10.1 | length 1.5
  Component Side w0.2: R10.1 LD3.1
NetR5_2: R5.2 U1.16 | length 15.3
  Component Side w0.2: v1(5.6,32.5) R5.2@7.25,32.5 ; v1(6.75,21.639) 6.905,21.639 7.033,21.767 7.55,21.25 U1.16
  Solder Side w0.2: v1(5.6,32.5) 6.495,31.605 6.495,22.012 6.75,21.757 v1(6.75,21.639)
NetR7_2: R7.2 U1.7 | length 8.6
  Component Side w0.2: R7.2@12.3,32.65 12.9,32.05 U1.7
V_MAIN: C6.1 C7.2 C9.2 C15.1 C16.2 C19.2 C30.2 C31.2 P1.1 P7.2 R8.2 U1.2 U1.3 U1.34 U1.35 U1.40 U1.41 U1.44 U1.45 | length 141.3
  Component Side w0.2: v1(22.8,38.5) R8.2
  Component Side w0.5: C19.2@15.15,12.8 15.15,15.7 ; 15.15,24.3 C7.2@15.15,27.2 ; 17.475,19.025 19.875,19.025 C16.2 20.012,18.962 20.637,18.962 20.633,18.958 v1(20.633,18.912) ; 17.475,20.975 19.875,20.975 C9.2 20.012,21.038 20.637,21.038 20.633,21.042 v1(20.633,21.088)
  Solder Side w1: P7.2 13.5,38.1 C6.1 ; v1(15.177,12.067) 15.177,9.823 C15.1 ; v1(15.177,27.933) 15.177,30.177 C6.1 ; v1(20.633,18.912) 21.9,17.645 21.9,8.3 20.3,6.7 C15.1 ; v1(20.633,21.088) 21.9,22.355 21.9,31.7 20.3,33.3 C6.1 ; 23.25,38.25 23.15,38.15 C6.1 ; 23.4,38.4 31.114,38.4 37.6,31.914 37.6,21.7 ; P1.1 37.55,21.75 37.6,21.7 ; C15.1 23.4,1.6 31.114,1.6 37.6,8.086 37.6,21.7
pads on no net: C1.0 C2.0 C3.0 C4.0 C5.0 C6.0 C7.0 C8.0 C9.0 C10.0 C11.0 C12.0 C13.0 C14.0 C15.0 C16.0 C17.0 C18.0 C19.0 C20.0 C21.0 C22.0 C23.0 C24.0 C25.0 C26.0 C27.0 C28.0 C29.0 C30.0 C31.0 L1.0 LD1.0 LD3.0 MH1.M3 MH2.M3 MH3.M3 MH4.M3 R1.0 R2.0 R3.0 R4.0 R5.0 R6.0 R7.0 R8.0 R10.0 U2.0 U2.4

## Polygon pours and split planes (outlines as drawn)
GND on Component Side "GND_L01_P016" (solid, pour order 16): 0,0 0,40 40,40 40,0
NetC11_2 on Component Side "NETC11_2_L01_P002" (solid, pour order 2): 16.1,24.2 15.7,24.2 15.7,25.6 16.4,26.3 19.4,26.3 19.4,31.7 22.672,34.972 26.2,34.972 26.2,28.91 22.633,28.91 21.7,27.977 21.7,26.477 20.823,25.6 16.5,25.6 16.1,25.2
NetC13_2 on Component Side "NETC13_2_L01_P003" (solid, pour order 3): 17.475,21.925 17.475,21.425 18.875,21.425 19.223,21.773 19.223,23.525 21.075,23.525 21.075,22.312 26.2,22.312 26.2,28.6 22.333,28.6 18.817,25.3 18.597,25.3 18.597,22.097 18.425,21.925
NetC14_1 on Component Side "NETC14_1_L01_P004" (solid, pour order 4): 26.6,20.225 26.6,28.54 30.598,28.54 32.238,26.9 37.7,26.9 37.7,23.519 31.243,23.502 30.6,22.857 30.598,20.225
NetC12_2 on Component Side "NETC12_2_L01_P007" (solid, pour order 7): 26.6,37.7 26.6,26.9 37.7,26.9 37.7,30.5 34.3,30.5 31.2,33.6 31.2,36.642 30.142,37.7
NetC22_2 on Component Side "NETC22_2_L01_P012" (solid, pour order 12): 16.1,15.8 15.7,15.8 15.7,14.4 16.4,13.7 19.4,13.7 19.4,8.3 22.672,5.028 26.2,5.028 26.2,11.09 22.633,11.09 21.7,12.023 21.7,13.523 20.823,14.4 16.5,14.4 16.1,14.8
NetC20_2 on Component Side "NETC20_2_L01_P013" (solid, pour order 13): 17.475,18.075 17.475,18.575 18.875,18.575 19.223,18.227 19.223,16.475 21.075,16.475 21.075,17.688 26.2,17.688 26.2,11.4 22.333,11.4 18.817,14.7 18.597,14.7 18.597,17.903 18.425,18.075
NetC21_2 on Component Side "NETC21_2_L01_P014" (solid, pour order 14): 26.6,19.775 26.6,11.46 30.598,11.46 32.238,13.1 37.7,13.1 37.7,16.481 31.227,16.498 30.6,17.127 30.598,19.775
NetC24_1 on Component Side "NETC24_1_L01_P015" (solid, pour order 15): 26.6,2.3 26.6,13.1 37.7,13.1 37.7,9.5 34.3,9.5 31.2,6.4 31.2,3.358 30.142,2.3
GND on Solder Side "GND_L02_P017" (solid, pour order 17): 0,0 0,40 40,40 40,0

## Silkscreen, mask and mechanical layers (free items; w line width, h text height)
Top Overlay:
  lines w0.5: 31.2,16.5 40,16.5 ; 31.2,23.5 40,23.5 ; 37.39,9.5 37.39,30.5 ; 40,9.5 31.2,9.5 31.2,30.5 40,30.5
  text "PWR" at 29.801,37.7 h1
  text "-" at 5.757,37.343 h1
  text "V+" at 13.198,37.343 h1
  text "5V" at 3.355,30.63 h1
  text "GND" at 3.355,28.09 h1
  text "MCK" at 3.355,25.55 h1
  text "LEFT" at 39.9,23.5 h1.1 r90
  text "LCK" at 3.355,23.01 h1
  text "SCK" at 3.355,20.47 h1
  text "SDI" at 3.355,17.93 h1
  text "-PWR+" at 39.9,16.5 h1.1 r90
  text "SDA" at 3.355,15.39 h1
  text "SCL" at 3.355,12.85 h1
  text "PDN" at 3.355,10.31 h1
  text "RIGHT" at 39.9,9.5 h1.1 r90
  text "RST" at 3.355,7.77 h1
  text "3V3" at 29.801,0.7 h1
Bottom Overlay:
  lines w0.3: 30.2,15.2 30.2,30.5
  lines w0.5: 31.2,16.5 40,16.5 ; 31.2,23.5 40,23.5 ; 37.39,9.5 37.39,30.5 ; 40,9.5 31.2,9.5 31.2,30.5 40,30.5
  text "5V" at 5.772,30.63 h1
  text "LEFT" at 39.9,30.5 h1.1 r90
  text "GND" at 7.518,28.09 h1
  text "MCK" at 7.518,25.55 h1
  text "-PWR+" at 39.9,23.5 h1.1 r90
  text "LCK" at 7.518,23.01 h1
  text "SCK" at 7.518,20.47 h1
  text "SDI" at 7.518,17.93 h1
  text "RIGHT" at 39.9,16.5 h1.1 r90
  text "SDA" at 7.518,15.39 h1
  text "TAS5711 Breakout / v1.0A /  / 20W Stereo Amp / 4-8Ohm Speakers / 8-26V Power / I2S Audio Input / I2C Control" at 29.8,14.2 h1
  text "SCL" at 7.518,12.85 h1
  text "PDN" at 7.518,10.31 h1
  text "RST" at 7.518,7.77 h1
Top Courtyard:
  lines w0.254: 0,20 45,20
Mechanical 4:
  the board outline again, w0.254